# EAGLE board Vinduno-R-22-3-15 (EAGLE 7.1.0)
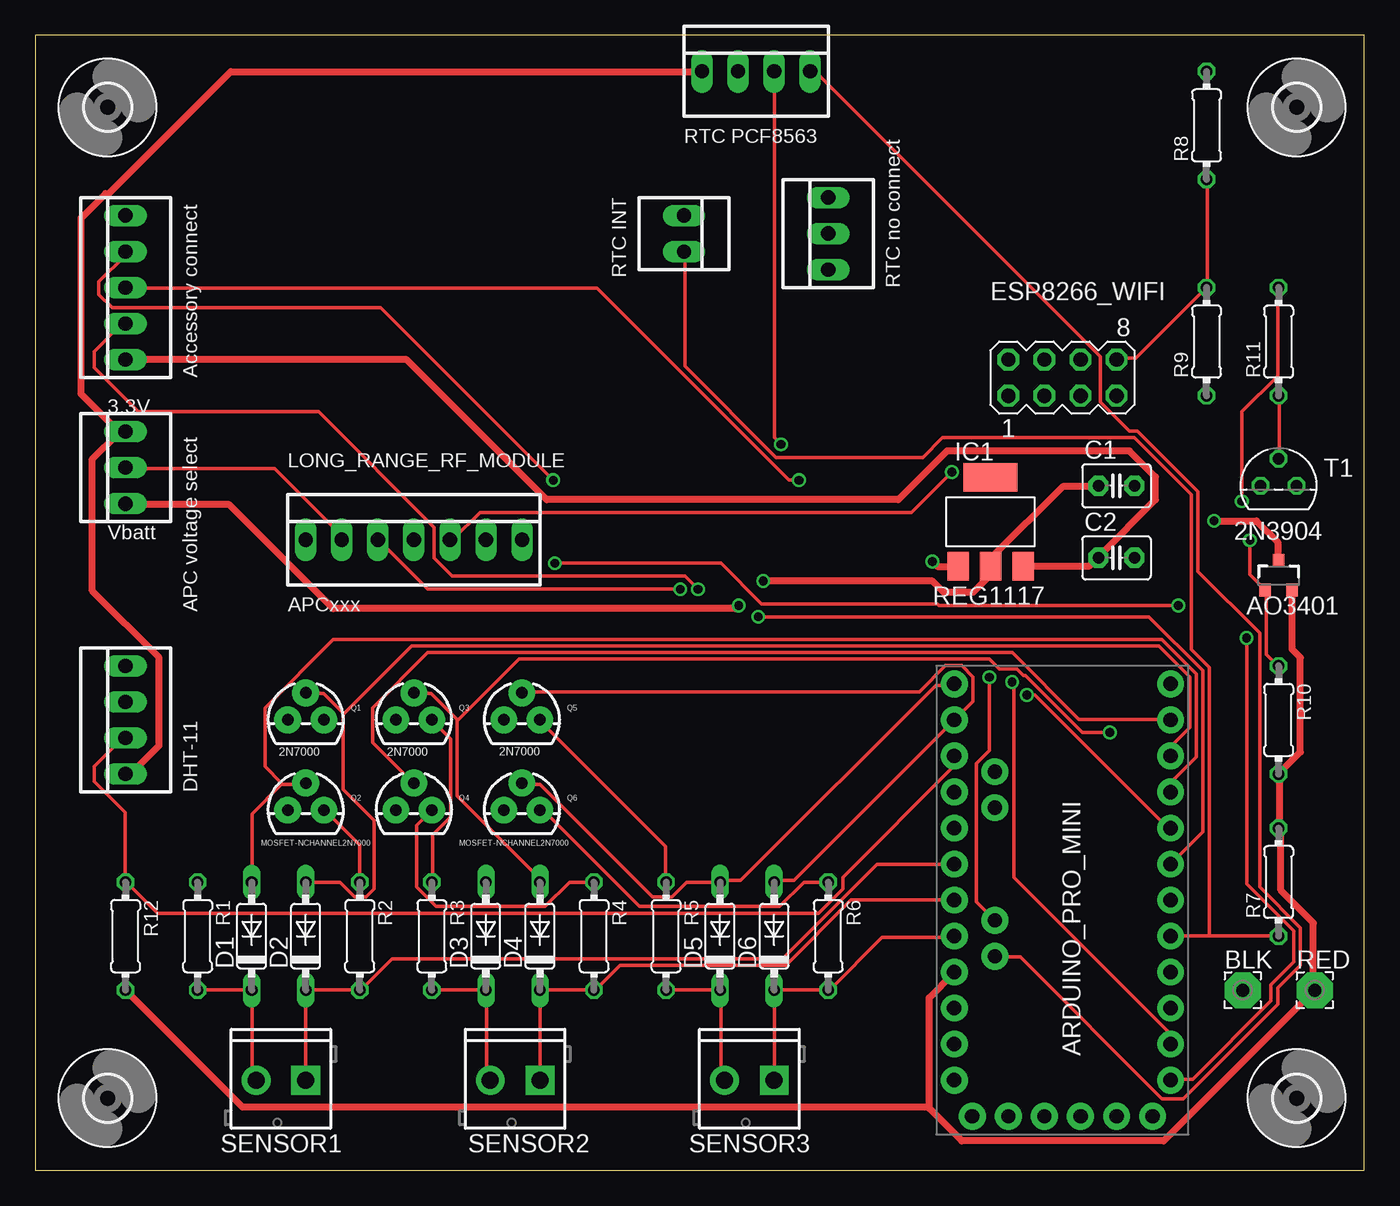
[diagram p0: board, top side]
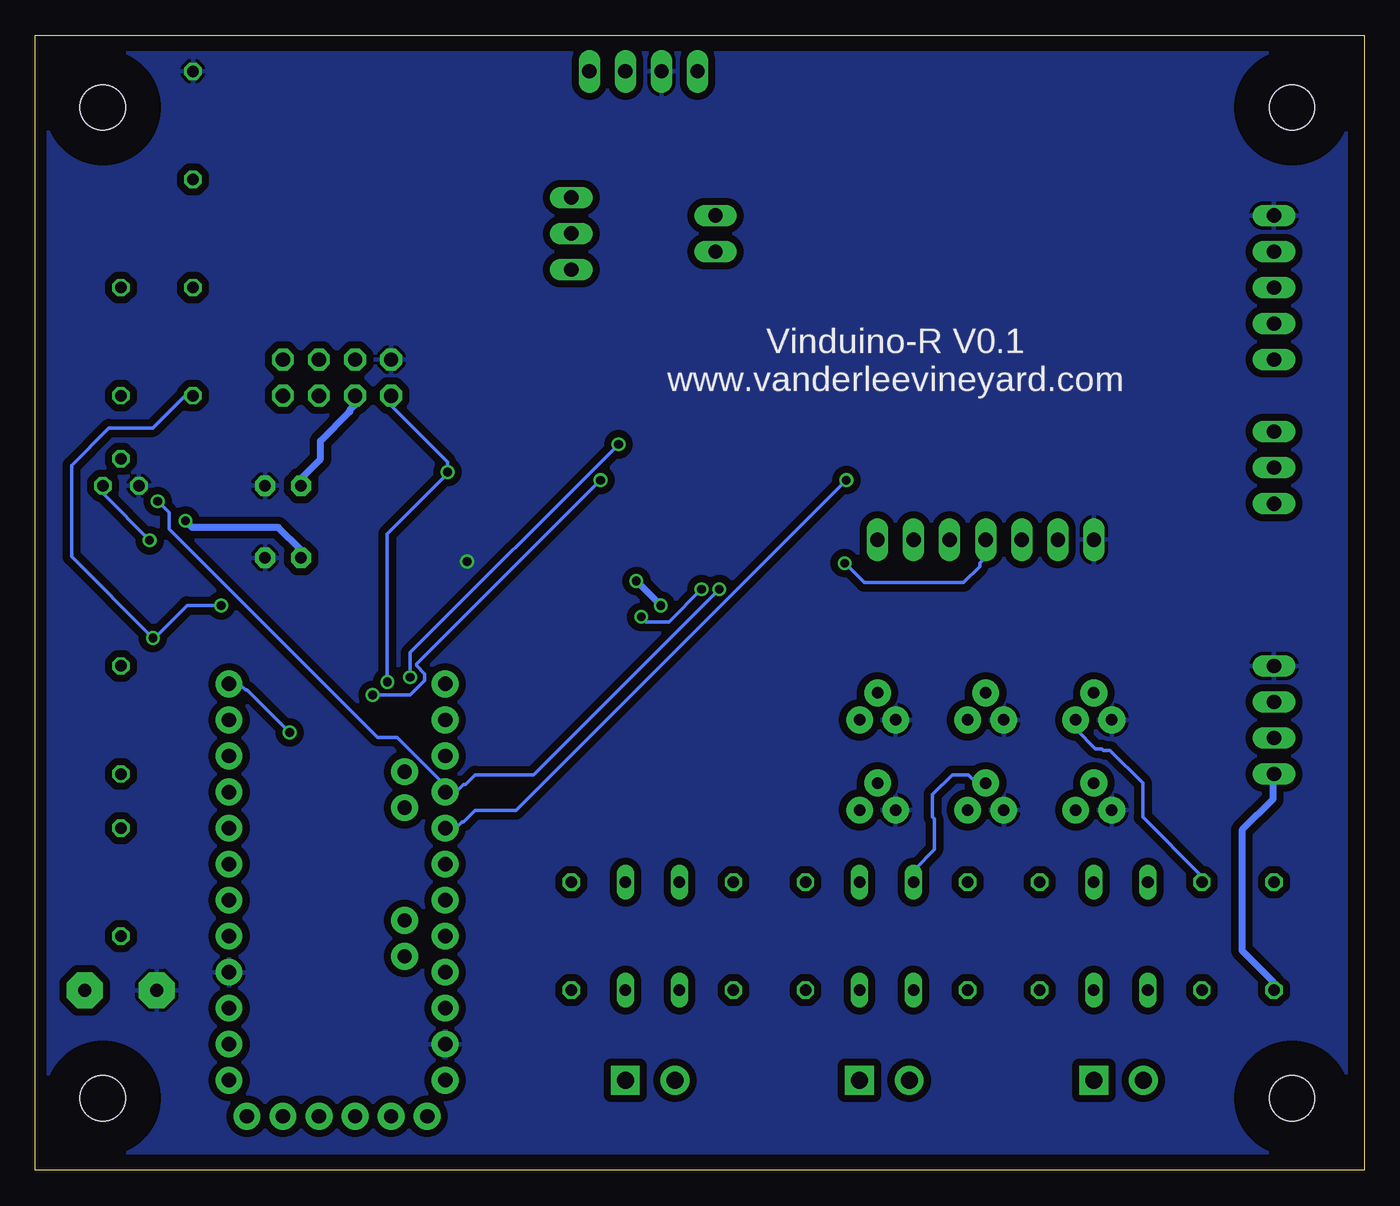
[diagram p1: board, bottom side, seen from below]

Size 93.65 x 80 mm. Coordinates in mm from the lower left corner, seen from the top.
Outline: 0,0 93.65,0 93.65,80 0,80 0,0
Copper layers (1*16): Top 0.0356mm / dielectric 1.5011mm / Bottom 0.0356mm
Design rules "LaenPCBOrder": minimum track width 6mil, minimum drill 13mil, track to track 6mil, track to pad 6mil, pad to pad 6mil, via to via 6mil, smd to smd 6mil, copper to edge 15mil, drill to drill 6mil, minimum pad ring 7mil, minimum via ring 7mil, stop-mask expansion 3mil, vias tented up to drill 0mil, thermal gap 10mil
Net classes: 0 default: width 0.254 mm, clearance 0.205 mm; 1 Supply: width 0.508 mm, clearance 0.508 mm

## Footprints (pad centres in the part's own frame; a part is rotated, then mirrored left to right if it is on the bottom)
22-23-2051 = drill 1 long: 1 -5.08,0; 2 -2.54,0; 3 0,0; 4 2.54,0; 5 5.08,0
2,54/0,9 = drill 0.914 pad 2.54 octagon: 1 0,0
C025-030X050 = drill 0.813 pad 1.422 octagon: 1 -1.27,0; 2 1.27,0
DO35-7 = drill 0.813 long: A 3.81,0; C -3.81,0
22-23-2041 = drill 1 long: 1 -3.81,0; 2 -1.27,0; 3 1.27,0; 4 3.81,0
MA04-2 = drill 1.016 octagon: 1 -3.81,-1.27; 2 -3.81,1.27; 3 -1.27,-1.27; 4 -1.27,1.27; 5 1.27,-1.27; 6 1.27,1.27; 7 3.81,-1.27; 8 3.81,1.27
SOT223 = smd 1.499 x 2.007: 1 -2.261,-3.15; 2 0.025,-3.15; 3 2.311,-3.15 | smd 3.81 x 2.007: 4 0,3.15
22-23-2071 = drill 1 long: 1 -7.62,0; 2 -5.08,0; 3 -2.54,0; 4 0,0; 5 2.54,0; 6 5.08,0; 7 7.62,0
ARDUINO_PRO_MINI = drill 1.016 pad 1.88: 1 -7.62,12.7; 2 -7.62,10.16; 3 -7.62,7.62; 4 -7.62,5.08; 5 -7.62,2.54; 6 -7.62,0; 7 -7.62,-2.54; 8 -7.62,-5.08; 9 -7.62,-7.62; 10 -7.62,-10.16; 11 -7.62,-12.7; 12 -7.62,-15.24; 13 7.62,-15.24; 14 7.62,-12.7; 15 7.62,-10.16; 16 7.62,-7.62; 17 7.62,-5.08; 18 7.62,-2.54; 19 7.62,0; 20 7.62,2.54; 21 7.62,5.08; 22 7.62,7.62; 23 7.62,10.16; 24 7.62,12.7; A4 4.763,1.429; A5 4.763,3.969; A6 4.763,-9.049; A7 4.763,-6.509; BLK -6.35,15.24; GND -3.81,15.24; GRN 6.35,15.24; RXI 1.27,15.24; TXO 3.81,15.24; VCC -1.27,15.24
TO-92 = drill 0.813 pad 1.88: 1 -1.27,0; 2 0,1.905; 3 1.27,0
SOT23-3 = smd 0.8 x 0.9: 1 -0.95,-1; 2 0.95,-1; 3 0,1.1
0204/7 = drill 0.813 octagon: 1 -3.81,0; 2 3.81,0
22-23-2021 = drill 1 long: 1 -1.27,0; 2 1.27,0
22-23-2031 = drill 1 long: 1 -2.54,0; 2 0,0; 3 2.54,0
SCREWTERMINAL-3.5MM-2 = drill 1.2 pad 2.032 square: 1 0,0 | drill 1.2 pad 2.032: 2 3.5,0
TO92 = drill 0.813 octagon: 1 1.27,0; 2 0,1.905; 3 -1.27,0
3,2 = hole 3.2: 0,0

## Placement (x,y rotation side)
ACC  Accessory connect  [22-23-2051]  6.35,62.23 90 top
BLK  [2,54/0,9]  85.09,12.7 0 top
C1  1uF  [C025-030X050]  76.2,48.26 0 top
C2  1uF  [C025-030X050]  76.2,43.18 0 top
D1  1N4148DO35-7  [DO35-7]  15.24,16.51 90 top
D2  1N4148DO35-7  [DO35-7]  19.05,16.51 90 top
D3  1N4148DO35-7  [DO35-7]  31.75,16.51 90 top
D4  1N4148DO35-7  [DO35-7]  35.56,16.51 90 top
D5  1N4148DO35-7  [DO35-7]  48.26,16.51 90 top
D6  1N4148DO35-7  [DO35-7]  52.07,16.51 90 top
DHT  DHT-11  [22-23-2041]  6.35,31.75 90 top
ESP8266_WIFI  WiFi  [MA04-2]  72.39,55.88 0 top
IC1  REG1117  [SOT223]  67.31,45.72 0 top
LONG_RANGE_RF_MODULE  APCxxx  [22-23-2071]  26.67,44.45 0 top
MCU  ARDUINO_PRO_MINI  [ARDUINO_PRO_MINI]  72.39,19.05 180 top
Q1  2N7000  [TO-92]  19.05,31.75 0 top
Q2  MOSFET-NCHANNEL2N7000  [TO-92]  19.05,25.4 0 top
Q3  2N7000  [TO-92]  26.67,31.75 0 top
Q4  MOSFET-NCHANNEL2N7000  [TO-92]  26.67,25.4 0 top
Q5  2N7000  [TO-92]  34.29,31.75 0 top
Q6  MOSFET-NCHANNEL2N7000  [TO-92]  34.29,25.4 0 top
Q7  AO3401  [SOT23-3]  87.63,41.91 0 top
R1  4k7  [0204/7]  11.43,16.51 270 top
R2  4k7  [0204/7]  22.86,16.51 270 top
R3  4k7  [0204/7]  27.94,16.51 270 top
R4  4k7  [0204/7]  39.37,16.51 270 top
R5  4k7  [0204/7]  44.45,16.51 270 top
R6  4k7  [0204/7]  55.88,16.51 270 top
R7  4k7  [0204/7]  87.63,20.32 90 top
R8  10k  [0204/7]  82.55,73.66 90 top
R9  3k3  [0204/7]  82.55,58.42 90 top
R10  10k  [0204/7]  87.63,31.75 270 top
R11  22k  [0204/7]  87.63,58.42 90 top
R12  3k3  [0204/7]  6.35,16.51 270 top
RED  [2,54/0,9]  90.17,12.7 0 top
RTC  RTC PCF8563  [22-23-2041]  50.8,77.47 0 top
RTC_INT  RTC INT  [22-23-2021]  45.72,66.04 270 top
RTC_NC  RTC no connect  [22-23-2031]  55.88,66.04 90 top
SENSOR1  Sensor 1  [SCREWTERMINAL-3.5MM-2]  19.05,6.35 180 top
SENSOR2  M023.5MM  [SCREWTERMINAL-3.5MM-2]  35.56,6.35 180 top
SENSOR3  M023.5MM  [SCREWTERMINAL-3.5MM-2]  52.07,6.35 180 top
T1  2N3904  [TO92]  87.63,48.26 0 top
U$1  [3,2]  5.08,74.93 0 top
U$2  [3,2]  88.9,74.93 0 top
U$3  [3,2]  5.08,5.08 0 top
U$4  [3,2]  88.9,5.08 0 top
X2  22-23-2031  [22-23-2031]  6.35,49.53 90 top

## Library data of the parts
ACC = con-molex; MF: MOLEX; MPN: 22-23-2051; OC_FARNELL: 1462952; OC_NEWARK: 38C9178
BLK RED = wirepad
C1 C2 = adafruit
D1-D6 = diode
DHT = con-molex; MF: MOLEX; MPN: 22-23-2041; OC_FARNELL: 1462920; OC_NEWARK: 38C0355
ESP8266_WIFI = con-lstb; OC_FARNELL: unknown; OC_NEWARK: unknown
IC1 = burr-brown; MPN: REG1117; OC_FARNELL: 1097566; OC_NEWARK: 14P6981
LONG_RANGE_RF_MODULE = con-molex; MF: MOLEX; MPN: 22-23-2071; OC_FARNELL: 1654534; OC_NEWARK: 56H0445
MCU = SparkFun-Boards
Q1-Q6 = SparkFun-DiscreteSemi
Q7 = SparkFun-DiscreteSemi; PROD_ID: TRANS-08285
R1 R3-R12 = rcl; R1: 4k7
R2 = rcl; R2: 4k7
RTC = con-molex; MF: MOLEX; MPN: RTC; OC_FARNELL: 1462920; OC_NEWARK: 38C0355
RTC_INT = con-molex; MF: MOLEX; MPN: 22-23-2021; OC_FARNELL: 1462926; OC_NEWARK: 25C3832
RTC_NC X2 = con-molex; MF: MOLEX; MPN: 22-23-2031; OC_FARNELL: 1462950; OC_NEWARK: 30C0862
SENSOR1-SENSOR3 = SparkFun-Connectors
T1 = transistor
U$1-U$4 = holes

## Nets
+5V [Supply]: DHT.1 MCU.21 Q7.2 R7.2 R10.2 R12.2 RED.1 RTC.1 X2.3
+5V/2 [Supply]: ACC.1 C2.1 IC1.3 Q7.3
DIODE1: D1.A MCU.9 Q2.2
DIODE2: D2.A MCU.10 Q1.2
DIODE3: D3.A MCU.11 Q4.2
DIODE4: D4.A MCU.12 Q3.2
DIODE5: D5.A MCU.13 Q6.2
DIODE6: D6.A MCU.14 Q5.2
GND [Supply]: ACC.5 BLK.1 C1.2 C2.2 DHT.4 ESP8266_WIFI.2 IC1.1 LONG_RANGE_RF_MODULE.1 MCU.4 MCU.23 Q1.1 Q2.1 Q3.1 Q4.1 Q5.1 Q6.1 R8.2 RTC.2 T1.3
N$1: D1.C R1.2 SENSOR1.2
N$2: D2.C MCU.18 R2.2 SENSOR1.1
N$3: D3.C R3.2 SENSOR2.2
N$4: D4.C MCU.19 R4.2 SENSOR2.1
N$5: Q1.3 R1.1
N$6: D5.C R5.2 SENSOR3.2
N$7: D6.C MCU.20 R6.2 SENSOR3.1
N$8: ACC.4 MCU.17
N$9: MCU.A4 RTC.3
N$10: LONG_RANGE_RF_MODULE.3 MCU.16 R11.2
N$11: LONG_RANGE_RF_MODULE.4 MCU.1 R9.1
N$12: ESP8266_WIFI.1 LONG_RANGE_RF_MODULE.5 MCU.2
N$13: MCU.A5 RTC.4
N$14: Q2.3 R2.1
N$15: Q3.3 R3.1
N$16: Q4.3 R4.1
N$17: Q5.3 R5.1
N$18: Q6.3 R6.1
N$19: ESP8266_WIFI.8 R8.1 R9.2
N$20: DHT.2 MCU.15 R12.1
N$21: ACC.3 MCU.8
N$22: Q7.1 R10.1 T1.1
N$23: R11.1 T1.2
N$24: MCU.5 R7.1 RTC_INT.2
N$25: ACC.2 MCU.7
N$26 [Supply]: C1.1 ESP8266_WIFI.3 IC1.2 X2.1
N$27: LONG_RANGE_RF_MODULE.2 X2.2

## Tracks (layer width: path | path; a pad name or v marks a point on that pad's centre or on a via)
+5V
  Top 0.508: Q7.2 88.59,40.85 88.59,36.72 89.16,36.15 89.16,29.49 87.67,28 R10.2 87.67,27.77 87.67,24.21 R7.2 87.78,23.98 87.78,19.74 90.08,17.44 90.08,12.85 RED.1 90.08,12.62 79.52,2.07 65.29,2.07 63,4.36 63,4.47 | 63,4.47 63,12.16 64.72,13.88 MCU.21 | DHT.1 6.43,28 6.77,28 8.72,29.95 8.72,36.15 4.02,40.85 4.02,50.15 5.85,51.98 6.31,51.98 X2.3 5.74,52.21 3.21,54.74 3.21,67.13 4.93,68.85 5.16,68.85 13.77,77.46 46.93,77.46 RTC.1 | 63,4.47 14.57,4.47 6.43,12.62 R12.2
  Bottom 0.508: R12.2 6.43,12.74 6.43,13.31 8.61,15.49 8.61,23.98 6.43,26.16 6.43,27.88 DHT.1
+5V/2  (via drill 0.61)
  Top 0.508: v83.08,45.78 86.06,45.78 87.55,44.29 87.55,43.03 Q7.3 | IC1.3 69.65,42.57 74.24,42.57 74.82,43.15 C2.1 75.05,43.38 78.95,47.28 78.95,48.88 77.11,50.72 64.26,50.72 60.82,47.28 36.03,47.28 26.16,57.15 6.43,57.15 ACC.1
  Bottom 0.508: v83.08,45.78 82.62,45.33 76.54,45.33 74.93,43.72 74.93,43.26 C2.1
DIODE1
  Top 0.254: 17.33,27.2 15.26,25.13 15.26,20.43 D1.A | 17.33,27.2 19.05,27.2 Q2.2 | MCU.9 80.1,26.74 80.1,27.43 81.82,29.15 81.82,35 79.41,37.41 21,37.41 16.18,32.59 16.18,28.46 17.33,27.31 17.33,27.2
DIODE2
  Top 0.254: 21.69,32.24 21.69,26.85 23.87,24.67 23.87,19.85 23.29,19.28 22.49,19.28 21.46,20.31 19.16,20.31 D2.A | 21.69,32.24 20.31,33.62 19.16,33.62 Q1.2 | MCU.10 80.1,29.26 80.1,29.95 81.36,31.21 81.36,34.77 79.18,36.95 26.51,36.95 21.8,32.24 21.69,32.24
DIODE3
  Top 0.254: MCU.11 79.98,31.79 73.56,31.79 68.85,36.49 27.66,36.49 23.75,32.59 23.75,30.18 26.62,27.31 Q4.2
  Bottom 0.254: D3.A 31.67,20.43 31.67,21.23 30.29,22.61 30.29,24.79 30.41,24.9 30.41,26.51 29.03,27.88 27.88,27.88 27.31,27.31 26.74,27.31 Q4.2
DIODE4  (via drill 0.61)
  Top 0.254: 29.72,31.79 29.72,26.39 35.46,20.66 35.46,20.43 D4.A | 29.72,31.79 27.88,33.62 26.74,33.62 Q3.2 | v75.73,30.87 73.78,30.87 69.77,34.88 69.65,34.88 69.19,35.34 67.93,35.34 67.24,36.03 34.08,36.03 29.84,31.79 29.72,31.79
  Bottom 0.254: v75.73,30.87 78.72,33.85 78.83,33.85 79.18,34.2 79.98,34.2 MCU.12
DIODE5
  Top 0.254: Q6.2 34.31,27.2 35.57,27.2 43.49,19.28 44.87,19.28 45.9,20.31 48.2,20.31 D5.A 48.31,20.43 49.69,20.43 63.46,34.2 64.72,34.2 MCU.13
DIODE6
  Top 0.254: D6.A 52.1,20.43 53.47,20.43 64.72,31.67 MCU.14 64.83,31.79 66.1,33.05 66.1,34.77 65.29,35.57 64.14,35.57 62.31,33.74 34.31,33.74 Q5.2
GND  (via drill 0.61)
  Top 0.508: v63.23,42.92 63.57,42.57 64.95,42.57 IC1.1
  pour Bottom: 1.27,78.74 1.27,1.27 92.71,1.27 92.71,78.74
N$1
  Top 0.254: R1.2 11.47,12.74 15.15,12.74 D1.C 15.26,12.62 15.26,6.66 15.49,6.43 SENSOR1.2
N$2
  Top 0.254: MCU.18 64.72,21.57 59.33,21.57 52.67,14.92 25.13,14.92 22.95,12.74 R2.2 22.84,12.74 19.16,12.74 D2.C 19.05,12.62 19.05,6.43 SENSOR1.1
N$3
  Top 0.254: R3.2 28,12.74 31.67,12.74 D3.C 31.79,12.62 31.79,6.66 32.02,6.43 SENSOR2.2
N$4
  Top 0.254: MCU.19 64.72,19.05 57.49,19.05 52.9,14.46 41.2,14.46 39.47,12.74 R4.2 39.36,12.74 35.57,12.74 D4.C 35.57,12.62 35.57,6.43 SENSOR2.1
N$5
  Bottom 0.254: R1.1 11.47,20.43 11.47,20.77 15.61,24.9 15.61,27.31 17.9,29.61 18.36,29.61 18.48,29.72 18.93,29.72 20.31,31.1 20.31,31.67 Q1.3
N$6
  Top 0.254: R5.2 44.52,12.74 48.2,12.74 D5.C 48.31,12.62 48.31,6.66 48.54,6.43 SENSOR3.2
N$7
  Top 0.254: MCU.20 64.72,16.41 59.67,16.41 56,12.74 R6.2 55.77,12.74 52.1,12.74 D6.C 52.1,12.62 52.1,6.43 SENSOR3.1
N$8  (via drill 0.61)
  Top 0.254: v36.49,48.65 24.33,60.82 5.39,60.82 4.47,61.74 4.47,62.65 6.31,64.49 6.31,64.72 ACC.4
  Bottom 0.254: v36.49,48.65 59.78,25.36 62.65,25.36 63.46,24.56 63.57,24.56 63.92,24.21 64.72,24.21 MCU.17
N$9  (via drill 0.61)
  Top 0.254: v52.56,51.18 52.1,51.64 52.1,77.46 RTC.3 | v67.24,34.77 67.24,29.61 66.33,28.69 66.33,18.93 67.59,17.67 MCU.A4
  Bottom 0.254: v52.56,51.18 67.24,36.49 v67.24,34.77
N$10  (via drill 0.61)
  Top 0.254: v85.03,47.16 85.03,53.47 87.55,56 87.55,62.19 R11.2 | v45.44,40.97 27.66,40.97 24.21,44.41 LONG_RANGE_RF_MODULE.3
  Bottom 0.254: v85.03,47.16 84.23,46.36 84.23,45.21 69.54,30.52 68.16,30.52 64.83,27.2 64.83,26.74 MCU.16 64.72,26.74 63.92,26.74 63.46,27.2 63.34,27.2 62.65,27.88 58.52,27.88 v45.44,40.97
N$11  (via drill 0.61)
  Top 0.254: v85.37,37.52 85.37,20.2 88.7,16.87 88.7,14.69 87.09,13.08 87.09,11.93 81.59,6.43 80.1,6.43 MCU.1 | v36.6,42.8 48.31,42.8 51.18,39.93 63.57,39.93 63.69,39.82 v80.56,39.82
  Bottom 0.254: R9.1 82.62,54.51 83.19,54.51 85.37,52.33 88.47,52.33 91.11,49.69 91.11,43.26 v85.37,37.52 85.26,37.52 82.96,39.82 v80.56,39.82 | v36.6,42.8 35.23,41.42 28.23,41.42 27.08,42.57 27.08,42.8 26.74,43.15 26.74,44.41 LONG_RANGE_RF_MODULE.4
N$12  (via drill 0.61)
  Top 0.254: v64.6,49.23 61.74,46.36 31.33,46.36 29.49,44.52 29.26,44.52 LONG_RANGE_RF_MODULE.5 | v68.85,34.42 68.97,34.31 68.97,20.66 79.98,9.64 79.98,8.95 MCU.2
  Bottom 0.254: ESP8266_WIFI.1 68.62,54.51 68.62,53.93 64.6,49.92 v64.6,49.23 64.6,49.11 68.85,44.87 v68.85,34.42
N$13
  Top 0.254: RTC.4 54.62,77.46 54.97,77.46 75.05,57.38 75.05,54.16 77.11,52.1 77.69,52.1 81.93,47.85 81.93,42.23 86.29,37.87 86.29,19.97 89.16,17.1 89.16,14.46 87.55,12.85 87.55,11.7 80.9,5.05 79.41,5.05 69.42,15.03 67.7,15.03 MCU.A5
N$14
  Top 0.254: R2.1 22.84,20.43 22.84,22.95 20.43,25.36 Q2.3
N$15
  Top 0.254: R3.1 28,20.43 28,23.64 29.26,24.9 29.26,30.41 28,31.67 Q3.3
N$16
  Top 0.254: R4.1 37.64,20.31 35.92,18.59 28.23,18.59 26.85,19.97 26.85,24.33 27.88,25.36 Q4.3
N$17
  Top 0.254: R5.1 44.41,20.43 44.41,22.84 35.57,31.67 Q5.3
N$18
  Top 0.254: R6.1 55.77,20.31 54.16,20.31 52.44,18.59 42.57,18.59 35.8,25.36 35.57,25.36 Q6.3
N$19
  Top 0.254: R8.1 82.62,69.77 82.62,62.31 R9.2 82.5,62.19 77.57,57.26 76.31,57.26 ESP8266_WIFI.8
N$20
  Top 0.254: DHT.2 6.31,30.41 6.08,30.41 4.13,28.46 4.13,27.43 6.31,25.25 6.31,20.43 R12.1 6.43,20.31 8.61,18.13 55.2,18.13 56.92,19.85 56.92,20.66 64.72,28.46 64.72,29.15 MCU.15
N$21  (via drill 0.61)
  Top 0.254: v53.82,48.65 53.13,48.65 39.59,62.19 6.43,62.19 ACC.3 | v69.88,33.51 70.46,33.51 79.75,24.21 79.98,24.21 MCU.8
  Bottom 0.254: v53.82,48.65 66.78,35.69 66.78,35.57 66.21,35 66.21,34.54 67.24,33.51 v69.88,33.51
N$22  (via drill 0.61)
  Top 0.254: R10.1 87.55,35.57 86.75,36.38 86.75,40.85 Q7.1 86.64,40.97 85.6,42 v85.6,44.41
  Bottom 0.254: v85.6,44.41 88.82,47.62 88.82,48.2 T1.1
N$23
  Top 0.254: T1.2 87.67,50.26 87.67,54.51 R11.1
N$24
  Top 0.254: 82.73,16.52 80.1,16.52 MCU.5 | 82.73,16.52 87.55,16.52 R7.1 | 82.73,16.52 82.73,35.46 81.47,36.72 81.47,47.62 77.46,51.64 63.92,51.64 62.54,50.26 52.21,50.26 45.78,56.69 45.78,64.72 RTC_INT.2
N$25  (via drill 0.61)
  Top 0.254: v46.7,40.97 45.78,41.88 29.38,41.88 28.11,43.15 28.11,45.33 19.97,53.47 7.23,53.47 4.13,56.57 4.13,57.72 6.08,59.67 6.31,59.67 ACC.2 | v50.95,39.02 78.49,39.02 82.28,35.23 82.28,23.87 80.1,21.69 MCU.7
  Bottom 0.254: v46.7,40.97 49,38.67 50.6,38.67 v50.95,39.02
N$26  (via drill 0.61)
  Top 0.508: C1.1 74.82,48.2 72.41,48.2 67.36,43.15 67.36,42.57 IC1.2 67.24,42.34 67.24,41.88 66.1,40.74 64.03,40.74 63.23,41.54 v51.29,41.54 | v49.57,39.82 49.34,39.59 21,39.59 13.65,46.93 6.43,46.93 X2.1
  Bottom 0.508: v51.29,41.54 v49.57,39.82 | ESP8266_WIFI.3 71.14,54.51 71.14,53.93 71.49,53.59 71.49,53.47 73.56,51.41 73.56,50.15 74.93,48.77 74.93,48.31 C1.1
N$27
  Top 0.254: LONG_RANGE_RF_MODULE.2 21.57,44.52 21.57,44.75 16.87,49.46 6.43,49.46 X2.2

## Text on the board
bPlace: Vinduino-R V0.1 / www.vanderleevineyard.com
tNames: 3.3V | Vbatt | APC voltage select